# EAGLE board v1 (EAGLE 7.5.0)

Size 99.24 x 69.33 mm. Coordinates in mm from the lower left corner, seen from the top.
Outline: 0,0 99.24,0 99.24,69.33 0,69.33 0,0
Copper layers (1*16): Top 0.035mm / dielectric 1.5mm / Bottom 0.035mm
Design rules "Fusion_eagle_rule_v1.1": minimum track width 6mil, minimum drill 12mil, track to track 6mil, track to pad 6mil, pad to pad 6mil, via to via 6mil, smd to smd 0mil, copper to edge 10mil, drill to drill 10mil, minimum pad ring 10mil, minimum via ring 6mil, stop-mask expansion 2mil, vias tented up to drill 100mil, thermal gap 10mil
Net classes: 0 default: width 0.406 mm; 1 power: width 0.457 mm; 2 VIN: width 0.457 mm; 3 fine: width 0.406 mm; 4 aref: width 0.406 mm
bKeepout: area -1.3,54.9 to 114.3,82.8; area -7.6,52.3 to 108,80.3
tRestrict: area 0,51.1 to 95.2,72.6
bRestrict: area 0,49.8 to 95.2,71.4
vRestrict: area 44.5,28.2 to 59.7,32; area 44.5,29.5 to 48.3,43.4; area 55.9,30.7 to 59.7,43.4; area 44.5,39.6 to 59.7,43.4; area 7.6,4.1 to 11.4,9.1

## Footprints (pad centres in the part's own frame; a part is rotated, then mirrored left to right if it is on the bottom)
C1206 = smd 1.6 x 1.8: 1 -1.4,0; 2 1.4,0
TC2030-MCP-NL = smd 0.787 x 0.787: 5V 1.27,0.635; GND 3.81,0.635; MISO 1.27,-0.635; MOSI 2.54,0.635; RESET 3.81,-0.635; SCK 2.54,-0.635 | hole 0.889: 0,0; 5.08,-1.016; 5.08,1.016
LED-1206 = smd 1.2 x 1.4: A -1.5,0; C 1.5,0
RJ12-STRAIGHT-I2C = drill 0.9 pad 1.4: +5V 1.905,8.89; +12V -3.175,8.89; GND1 3.175,6.35; GND2 0.635,6.35; SCL -1.905,6.35; SDA -0.635,8.89 | hole 3.251: -5.08,0; 5.08,0
RJ12-STRAIGHT = drill 0.9 pad 1.4: +5V 1.905,8.89; +12V -3.175,8.89; GND1 3.175,6.35; GND2 0.635,6.35; I/O -0.635,8.89; PWM -1.905,6.35 | hole 3.251: -5.08,0; 5.08,0
CHIP-LED0805 = smd 1.2 x 1.2: A 0,-1.05; C 0,1.05
PG-SOT-223 = smd 1.2 x 1.4: 1 -2.311,-3.099; 2 0,-3.099; 3 2.311,-3.099 | smd 3.5 x 1.4: 4 0,3.099
R0805 = smd 1.3 x 1.5: 1 -0.95,0; 2 0.95,0
M0805 = smd 1.3 x 1.6: 1 -0.95,0; 2 0.95,0
R1206 = smd 1.6 x 1.803: 1 -1.422,0; 2 1.422,0
M1206 = smd 1.6 x 2: 1 -1.4,0; 2 1.4,0
RJ12-STRAIGHT-RGB = drill 0.9 pad 1.4: +5V 1.905,8.89; +12V -3.175,8.89; B -0.635,8.89; G 0.635,6.35; GND1 3.175,6.35; R -1.905,6.35 | hole 3.251: -5.08,0; 5.08,0
R0805' = smd 1.3 x 1.5: 1 -0.85,0; 2 0.85,0
TQFP44 = smd 1.5 x 0.5: 1 -5.8,4; 2 -5.8,3.2; 3 -5.8,2.4; 4 -5.8,1.6; 5 -5.8,0.8; 6 -5.8,0; 7 -5.8,-0.8; 8 -5.8,-1.6; 9 -5.8,-2.4; 10 -5.8,-3.2; 11 -5.8,-4; 23 5.8,-4; 24 5.8,-3.2; 25 5.8,-2.4; 26 5.8,-1.6; 27 5.8,-0.8; 28 5.8,0; 29 5.8,0.8; 30 5.8,1.6; 31 5.8,2.4; 32 5.8,3.2; 33 5.8,4 | smd 0.5 x 1.5: 12 -4,-5.8; 13 -3.2,-5.8; 14 -2.4,-5.8; 15 -1.6,-5.8; 16 -0.8,-5.8; 17 0,-5.8; 18 0.8,-5.8; 19 1.6,-5.8; 20 2.4,-5.8; 21 3.2,-5.8; 22 4,-5.8; 34 4,5.8; 35 3.2,5.8; 36 2.4,5.8; 37 1.6,5.8; 38 0.8,5.8; 39 0,5.8; 40 -0.8,5.8; 41 -1.6,5.8; 42 -2.4,5.8; 43 -3.2,5.8; 44 -4,5.8
KPJX-4S-S = drill 2 square: +5V 2.7,1.35; +12V -2.7,1.35; GND1 -2.5,5; GND2 2.5,5 | drill 2: P$1 -7.8,0; P$2 7.8,0; P$11 0,10.5 | drill 2.2: P$3 -7.8,8.5; P$4 7.8,8.5 | hole 1.7: -2.5,8.5; 2.5,8.5
NX6035 = smd 2.5 x 3: P$1 2.665,0; P$2 -2.565,0
32005-201 = smd 3.1 x 0.5: 1 3,1.6; 2 3,0.8; 3 3,0; 4 3,-0.8; 5 3,-1.6 | smd 2.5 x 2: M1 -3,-4.45; M2 -3,4.45 | smd 3.3 x 2: M3 2.9,4.45; M4 2.9,-4.45 | hole 0.9: 0,2.2; 0,-2.2

## Placement (x,y rotation side)
C2  22pF  [C1206]  43.18,38.35 0 bottom
C3  100nF  [C1206]  50.48,44.39 180 top
C7  10uF  [C1206]  16.51,40.89 90 bottom
C8  22pF  [C1206]  43.18,33.27 0 bottom
C10  10uF  [C1206]  30.48,42.16 90 bottom
C11  100nF  [C1206]  62.23,38.35 90 top
C12  100nF  [C1206]  33.02,42.16 270 bottom
CON1  SPI  [TC2030-MCP-NL]  9.53,8.83 270 bottom
D2  1N581D1206  [LED-1206]  25.4,44.7 180 bottom
D3  1N581D1206  [LED-1206]  25.4,39.62 180 bottom
D4  1N581D1206  [LED-1206]  25.4,42.16 180 bottom
I2C-J1  RJ12STRAIGHT-I2C  [RJ12-STRAIGHT-I2C]  60.96,15.49 180 top
J1  RJ12  [RJ12-STRAIGHT]  15.24,54.86 0 top
J2  RJ12  [RJ12-STRAIGHT]  31.75,54.86 0 top
J3  RJ12  [RJ12-STRAIGHT]  48.26,54.86 0 top
LED1  RED  [CHIP-LED0805]  26.67,39.62 90 top
LED4  GREEN  [CHIP-LED0805]  26.67,37.08 90 top
LED10  GREEN  [CHIP-LED0805]  26.67,34.54 90 top
LED18  Blue  [CHIP-LED0805]  15.24,33.27 90 top
LED19  Blue  [CHIP-LED0805]  15.24,35.81 90 top
Q1  BSP75  [PG-SOT-223]  15.24,51.05 180 bottom
Q2  BSP75  [PG-SOT-223]  31.75,51.05 180 bottom
Q3  BSP75  [PG-SOT-223]  -27.94,-4.83 0 top  (outside the outline)
Q4  BSP75  [PG-SOT-223]  48.26,51.05 180 bottom
Q5  BSP75  [PG-SOT-223]  64.77,51.05 180 bottom
Q6  BSP75  [PG-SOT-223]  81.28,51.05 180 bottom
Q7  BSP75  [PG-SOT-223]  50.8,23.11 0 bottom
Q8  BSP75  [PG-SOT-223]  27.94,23.11 0 bottom
Q9  BSP75  [PG-SOT-223]  16.51,7.87 270 bottom
Q10  BSP75  [PG-SOT-223]  20.32,23.11 0 bottom
Q11  BSP75  [PG-SOT-223]  35.56,23.11 0 bottom
Q12  BSP75  [PG-SOT-223]  43.18,23.11 0 bottom
Q13  BSP75  [PG-SOT-223]  -27.94,-13.72 0 top  (outside the outline)
R  1k  [R0805]  23.5,63.75 90 bottom
R3  10k  [M0805]  68.58,28.19 0 top
R4  1K  [R0805]  31.75,39.62 0 top
R13  1M  [R1206]  41.91,35.81 270 top
R15  10k  [M0805]  26.67,29.46 90 bottom
R24  22  [M1206]  16.51,39.62 180 top
R29  10K  [M0805]  58.42,19.3 180 bottom
R30  10K  [M0805]  63.5,19.3 0 bottom
R31  22  [M1206]  16.51,42.8 180 top
R32  1k  [R0805]  40.01,63.12 90 bottom
R33  1k  [R0805]  56.52,63.75 90 bottom
RGB-J1  RJ12  [RJ12-STRAIGHT-RGB]  27.94,15.49 180 top
RGB-J2  RJ12  [RJ12-STRAIGHT-RGB]  44.45,15.49 180 top
RL1  1K  [R0805]  20.32,33.27 180 top
RL3  1K  [R0805]  31.75,34.54 0 top
RL4  1K  [R0805']  31.75,37.08 180 top
RL7  1K  [R0805]  20.32,35.81 180 top
U$4  32U4  [TQFP44]  52.07,35.81 270 top
U$6  KPJX-4S-S  [KPJX-4S-S]  12.7,21.84 90 top
X3  16MHz  [NX6035]  38.42,35.81 90 top
X4  MINI-USB  [32005-201]  5.08,40.89 0 top

## Library data of the parts
C2 C3 C7 C8 C10-C12 R R4 R13 R32 R33 RL1 RL3 RL7 = rcl
CON1 D2-D4 I2C-J1 J1-J3 RGB-J1 RGB-J2 U$6 X3 = lpatiny
LED1 LED4 LED10 LED18 LED19 U$4 = adafruit
Q1-Q13 = infineon; OC_FARNELL: unknown; OC_NEWARK: unknown
R3 R15 R24 R29-R31 RL4 = resistor
X4 = con-cypressindustries; OC_FARNELL: unknown; OC_NEWARK: unknown

## Nets
+5V [power]: D3.A I2C-J1.+5V J1.+5V J2.+5V J3.+5V R29.1 R30.1 RGB-J1.+5V RGB-J2.+5V U$6.+5V
+5V/1 [fine]: C10.1 C12.2 D2.C D3.C D4.C R15.2 RL4.1 U$4.2 U$4.14 U$4.24 U$4.34 U$4.44
+12V [power]: I2C-J1.+12V J1.+12V J2.+12V J3.+12V RGB-J1.+12V RGB-J2.+12V RL3.2 U$6.+12V
A1: R33.1 U$4.37
A2: R32.1 U$4.38
A3: R.1 U$4.39
A4: U$4.40
A5: Q12.1 U$4.41
AREF: C11.1 U$4.42
D4*: U$4.25
D5*: Q10.1 U$4.31
D6*: Q1.1 U$4.27
D7*: U$4.1
D8*: U$4.28
D9*: Q8.1 U$4.29
D10*: Q2.1 U$4.30
D11*: Q9.1 U$4.12
D12*: Q4.1 U$4.26
D13*: R4.2 U$4.32
D18*: Q11.1 U$4.36
D+USB: R24.2 X4.3
D-USB: R31.2 X4.2
GND [power]: C2.1 C3.1 C7.1 C8.1 C10.2 C11.2 C12.1 CON1.GND I2C-J1.GND1 I2C-J1.GND2 J1.GND1 J1.GND2 J2.GND1 J2.GND2 J3.GND1 J3.GND2 LED1.C LED4.C LED10.C LED18.C LED19.C Q1.3 Q2.3 Q3.3 Q4.3 Q5.3 Q6.3 Q7.3 Q8.3 Q9.3 Q10.3 Q11.3 Q12.3 Q13.3 R3.1 RGB-J1.GND1 RGB-J2.GND1 U$4.5 U$4.15 U$4.23 U$4.35 U$4.43 U$6.GND1 U$6.GND2 X4.5
HWB: R3.2 U$4.33
ISP+5V: CON1.5V D2.A
MISO: CON1.MISO Q3.1 Q5.1 U$4.11
MOSI: CON1.MOSI Q7.1 U$4.10
N$1: J3.PWM Q4.2
N$2: J2.I/O R32.2
N$4: LED1.A R4.1
N$6 [aref]: Q10.2 RGB-J1.G
N$7: J3.I/O R33.2
N$8: LED18.A RL1.2
N$10 [aref]: Q11.2 RGB-J2.B
N$12: LED4.A RL4.2
N$14: LED19.A RL7.2
N$16: C3.2 U$4.6
N$18: J1.I/O R.2
N$20 [aref]: Q7.2 RGB-J2.R
N$23 [aref]: Q12.2 RGB-J2.G
N$28: J2.PWM Q2.2
N$34: J1.PWM Q1.2
N$42: C8.2 R13.2 U$4.17 X3.P$2
N$50 [aref]: Q9.2 RGB-J1.B
N$68 [aref]: Q8.2 RGB-J1.R
N$75: LED10.A RL3.1
RD+: R24.1 U$4.4
RD-: R31.1 U$4.3
RESET: CON1.RESET R15.1 U$4.13
RX: U$4.20
RXLED: RL1.1 U$4.8
SCK: CON1.SCK Q6.1 Q13.1 U$4.9
SCL: I2C-J1.SCL R30.2 U$4.18
SDA: I2C-J1.SDA R29.2 U$4.19
TX: U$4.21
TXLED: RL7.1 U$4.22
VUSB: C7.2 D4.A U$4.7 X4.1
XTAL1: C2.2 R13.1 U$4.16 X3.P$1

## Tracks (layer width: path | path; a pad name or v marks a point on that pad's centre or on a via)
+5V  (9 unrouted)
+5V/1  (11 unrouted)
+12V  (7 unrouted)
A1  (1 unrouted)
A2  (1 unrouted)
A3  (1 unrouted)
A5  (1 unrouted)
AREF  (1 unrouted)
D5*  (1 unrouted)
D6*  (1 unrouted)
D9*  (1 unrouted)
D10*  (1 unrouted)
D11*  (1 unrouted)
D12*  (1 unrouted)
D13*  (1 unrouted)
D18*  (1 unrouted)
D+USB  (1 unrouted)
D-USB  (1 unrouted)
GND  (44 unrouted)
HWB  (1 unrouted)
ISP+5V  (1 unrouted)
MISO  (3 unrouted)
MOSI  (2 unrouted)
N$1  (1 unrouted)
N$2  (1 unrouted)
N$4  (1 unrouted)
N$6  (1 unrouted)
N$7  (1 unrouted)
N$8  (1 unrouted)
N$10  (1 unrouted)
N$12  (1 unrouted)
N$14  (1 unrouted)
N$16  (1 unrouted)
N$18  (1 unrouted)
N$20  (1 unrouted)
N$23  (1 unrouted)
N$28  (1 unrouted)
N$34  (1 unrouted)
N$42  (3 unrouted)
N$50  (1 unrouted)
N$68  (1 unrouted)
N$75  (1 unrouted)
RD+  (1 unrouted)
RD-  (1 unrouted)
RESET  (2 unrouted)
RXLED  (1 unrouted)
SCK  (3 unrouted)
SCL  (2 unrouted)
SDA  (2 unrouted)
TXLED  (1 unrouted)
VUSB  (3 unrouted)
XTAL1  (3 unrouted)

## Text on the board
tNames: Halloween 2014 V1.0 | Halloween 2014 V1.0 | 1 | 1 | w5100 | Halloween 2014 V1.0
bNames: USB | TX/RX | LINKLED
tValues: Linving instrument Slave - V1.0
203bmp: C:/Users/G/Pictures/logo_epfl.bmp